# Altium PCB LCD16x2.PcbDoc
Units mil, origin at the board's own origin, x right, y up, seen from the top; angles counter-clockwise.
Board outline 3543.31 x 2755.91 mil, 2 copper layers (Top Layer, Bottom Layer); 14 components, 6 nets, 151 pads, 2 vias.
Unrouted connection lines stored in the file: 2.
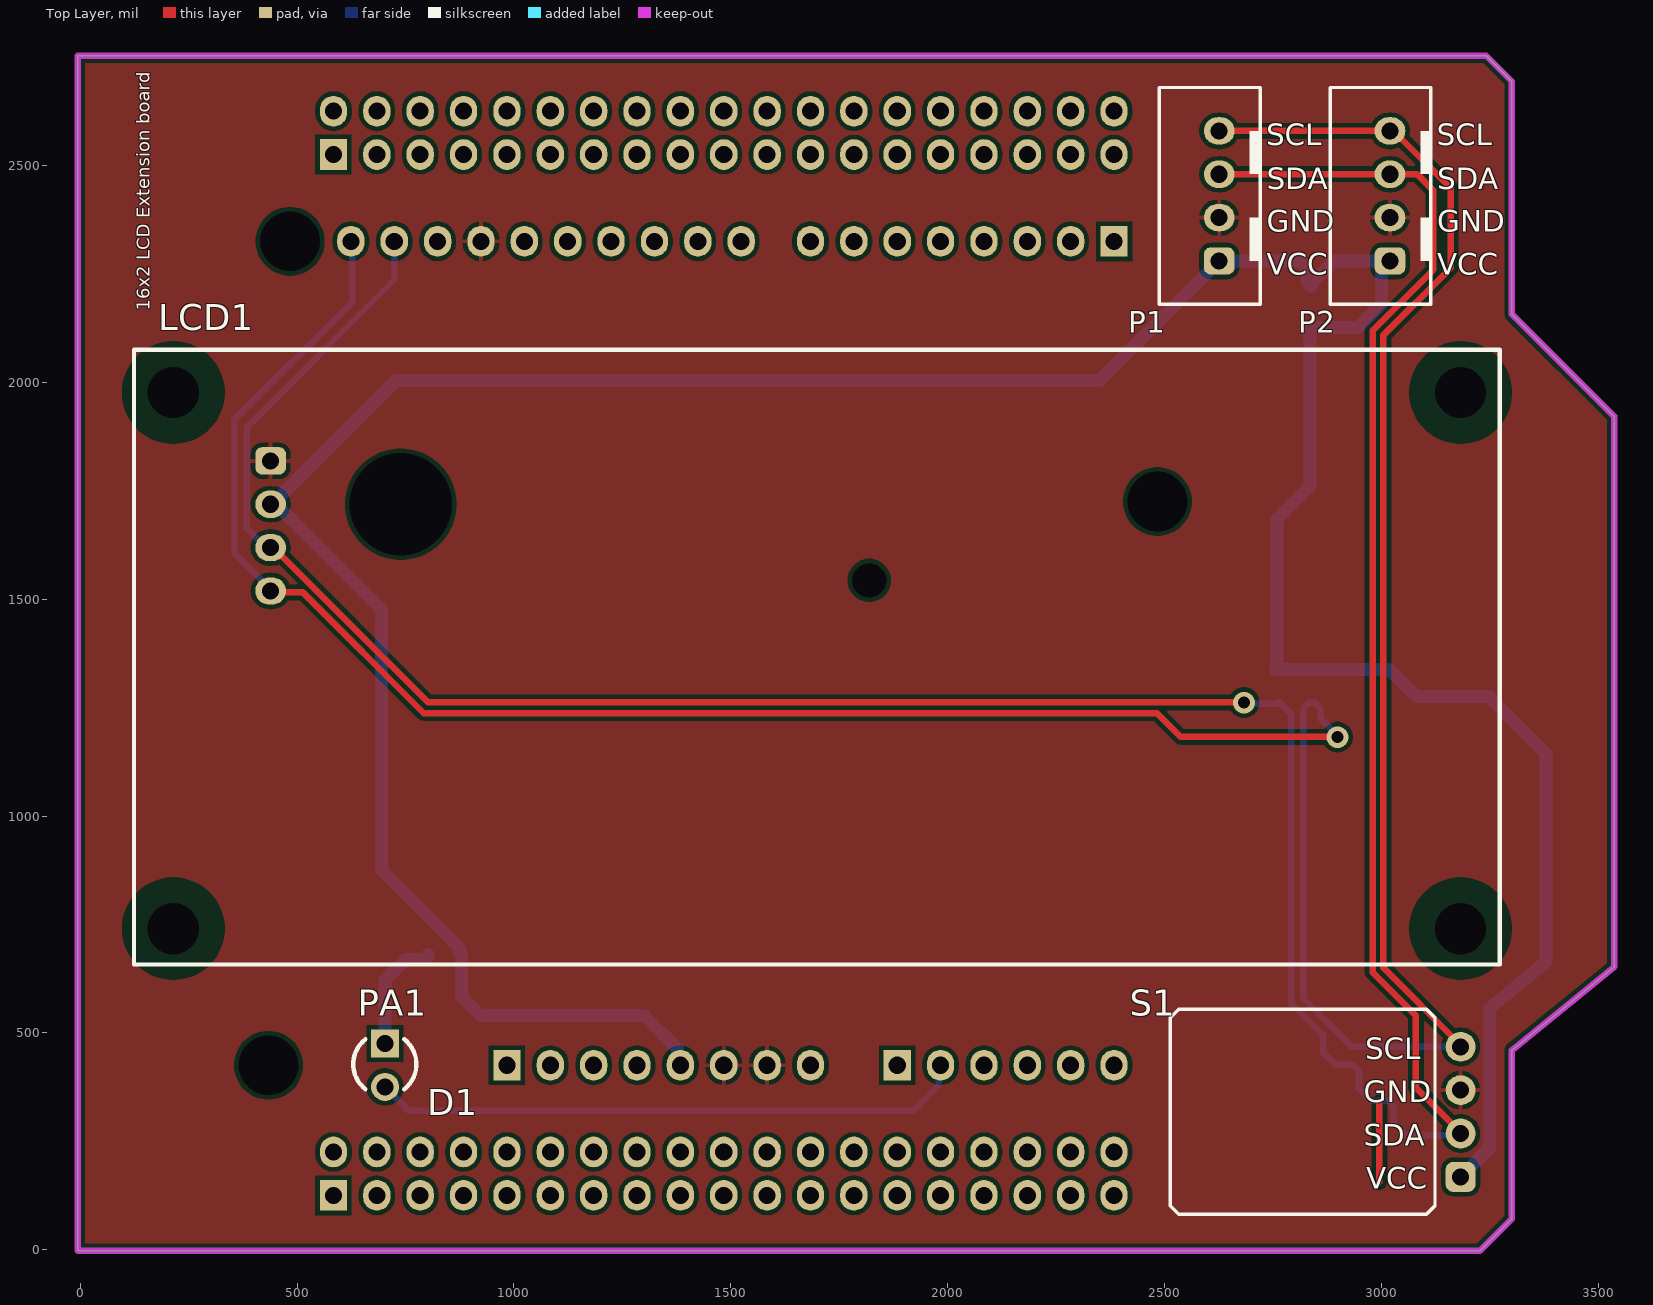
[diagram p0: Top Layer view]
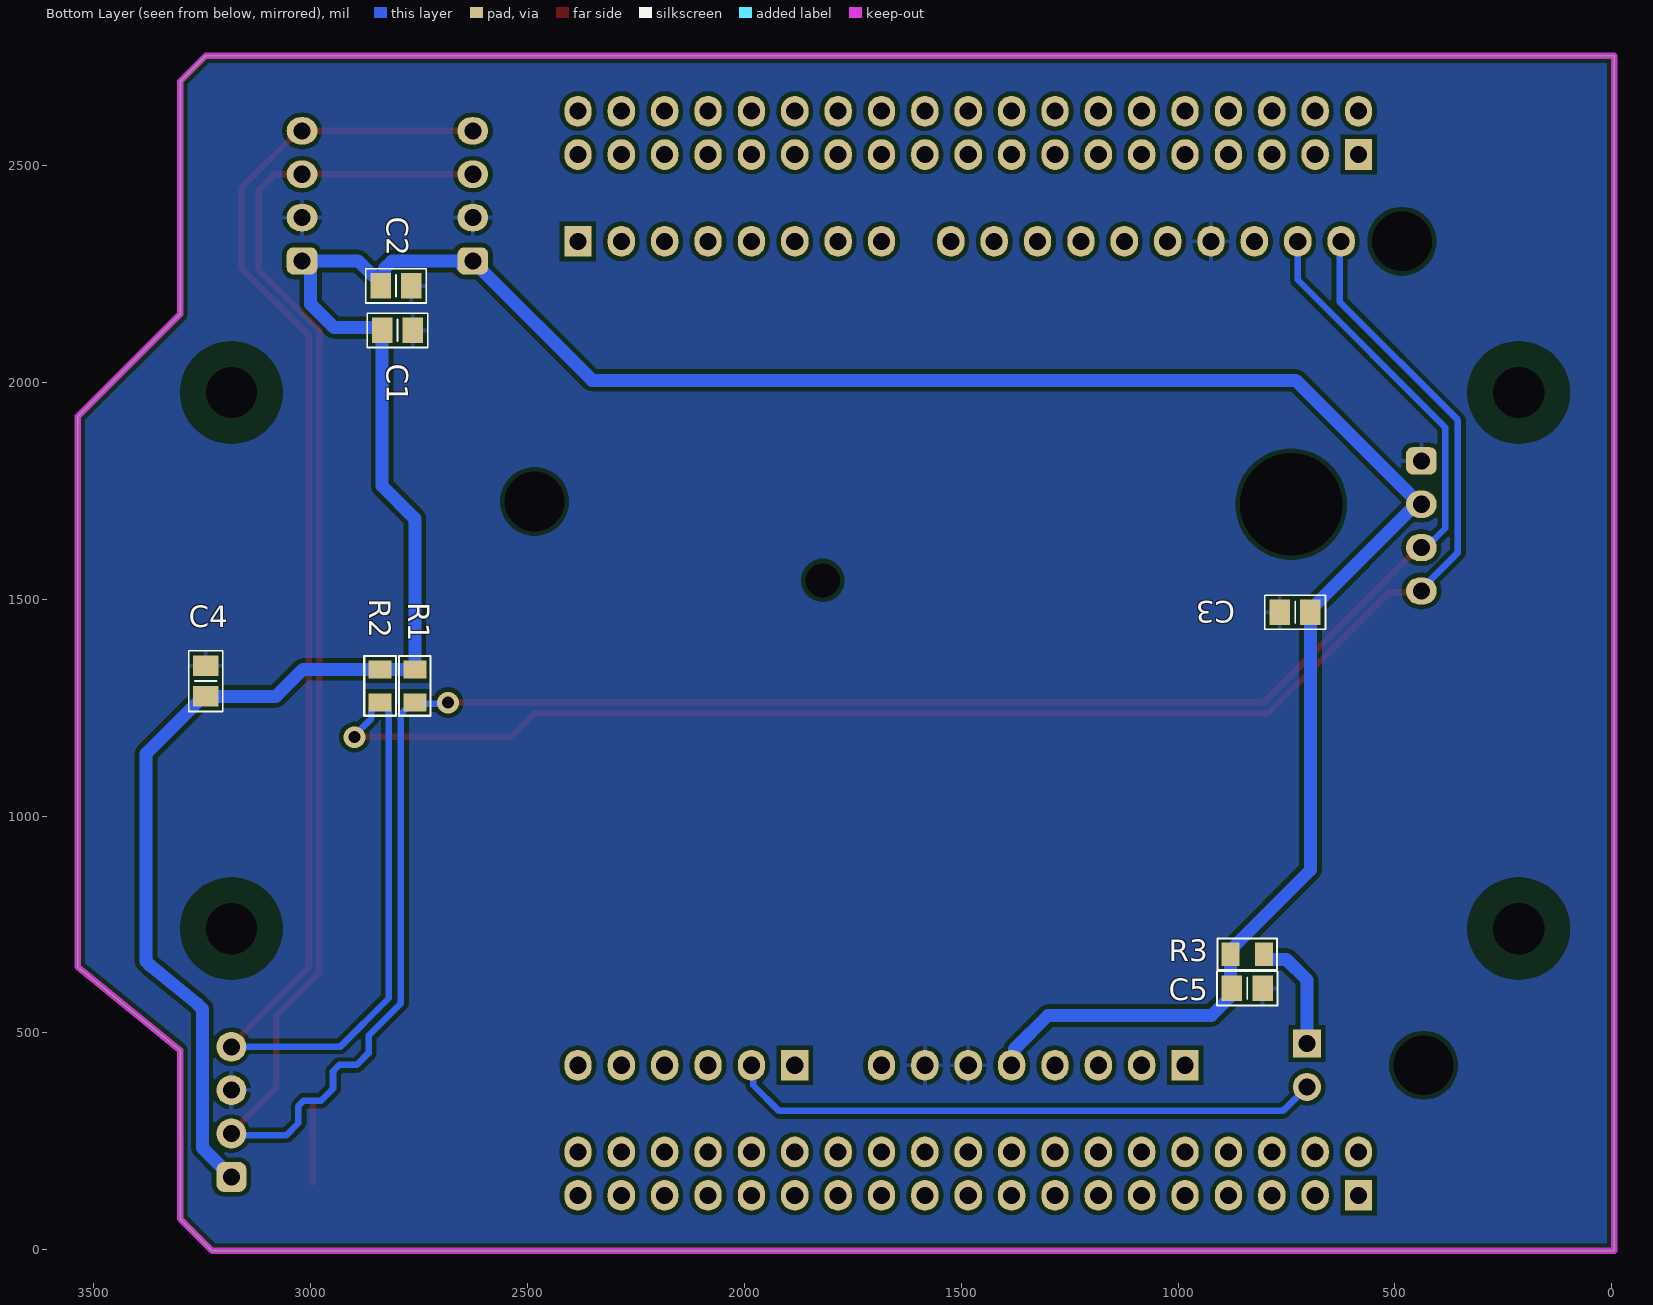
[diagram p1: Bottom Layer view, seen from below]
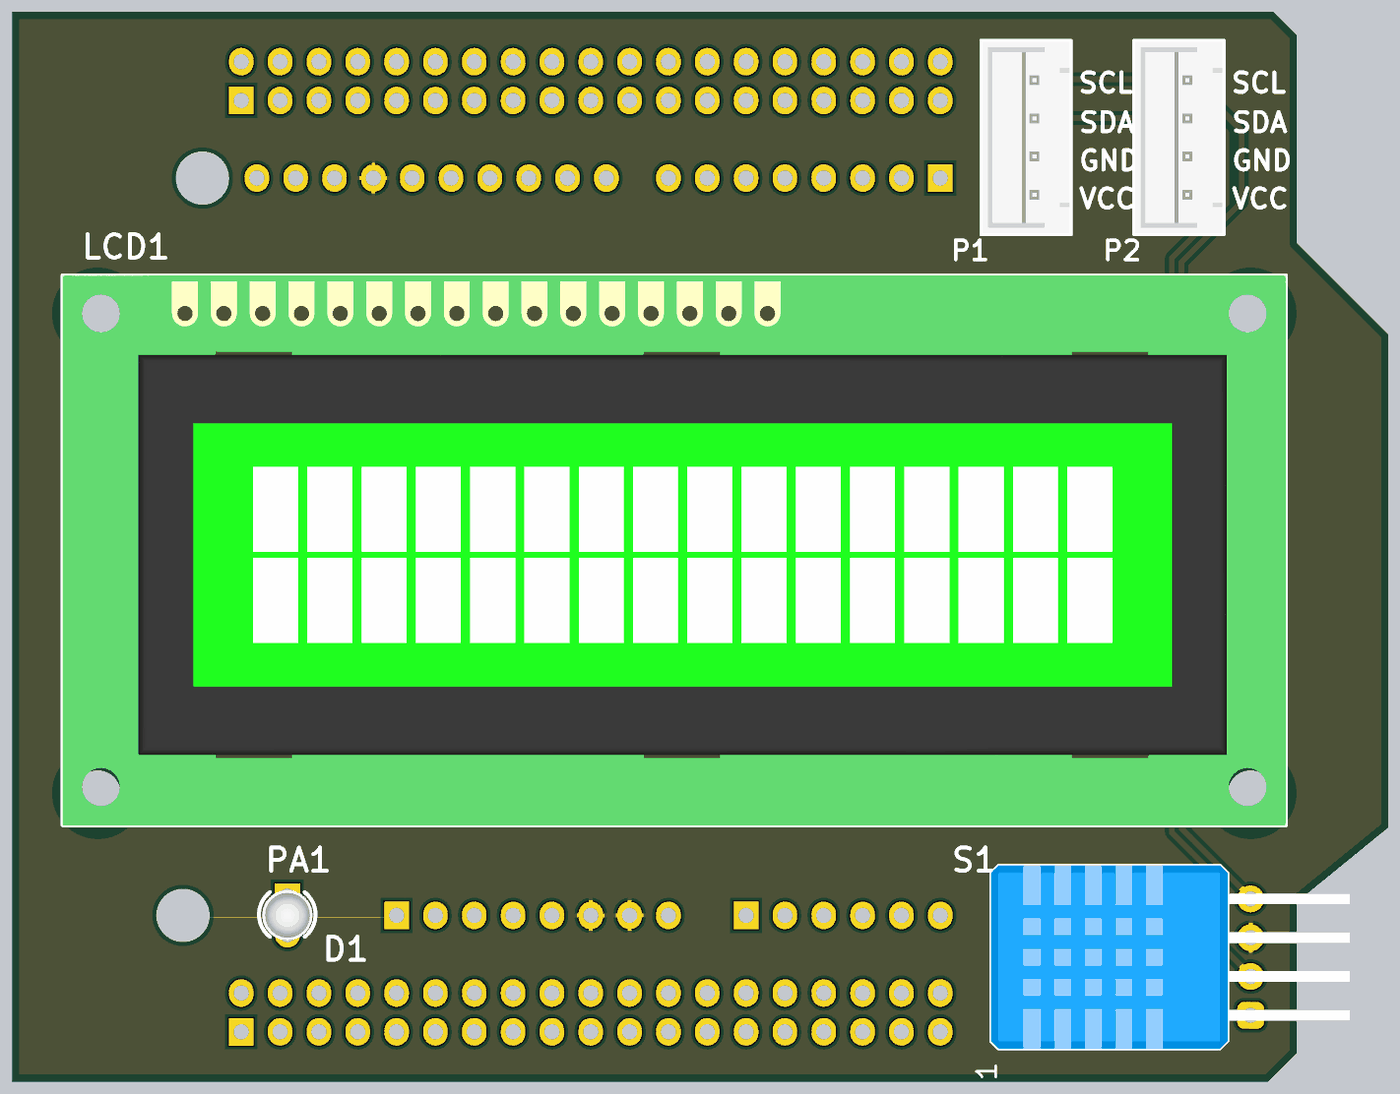
[diagram p2: 3D render of the assembled board from above, using the file's embedded part models]
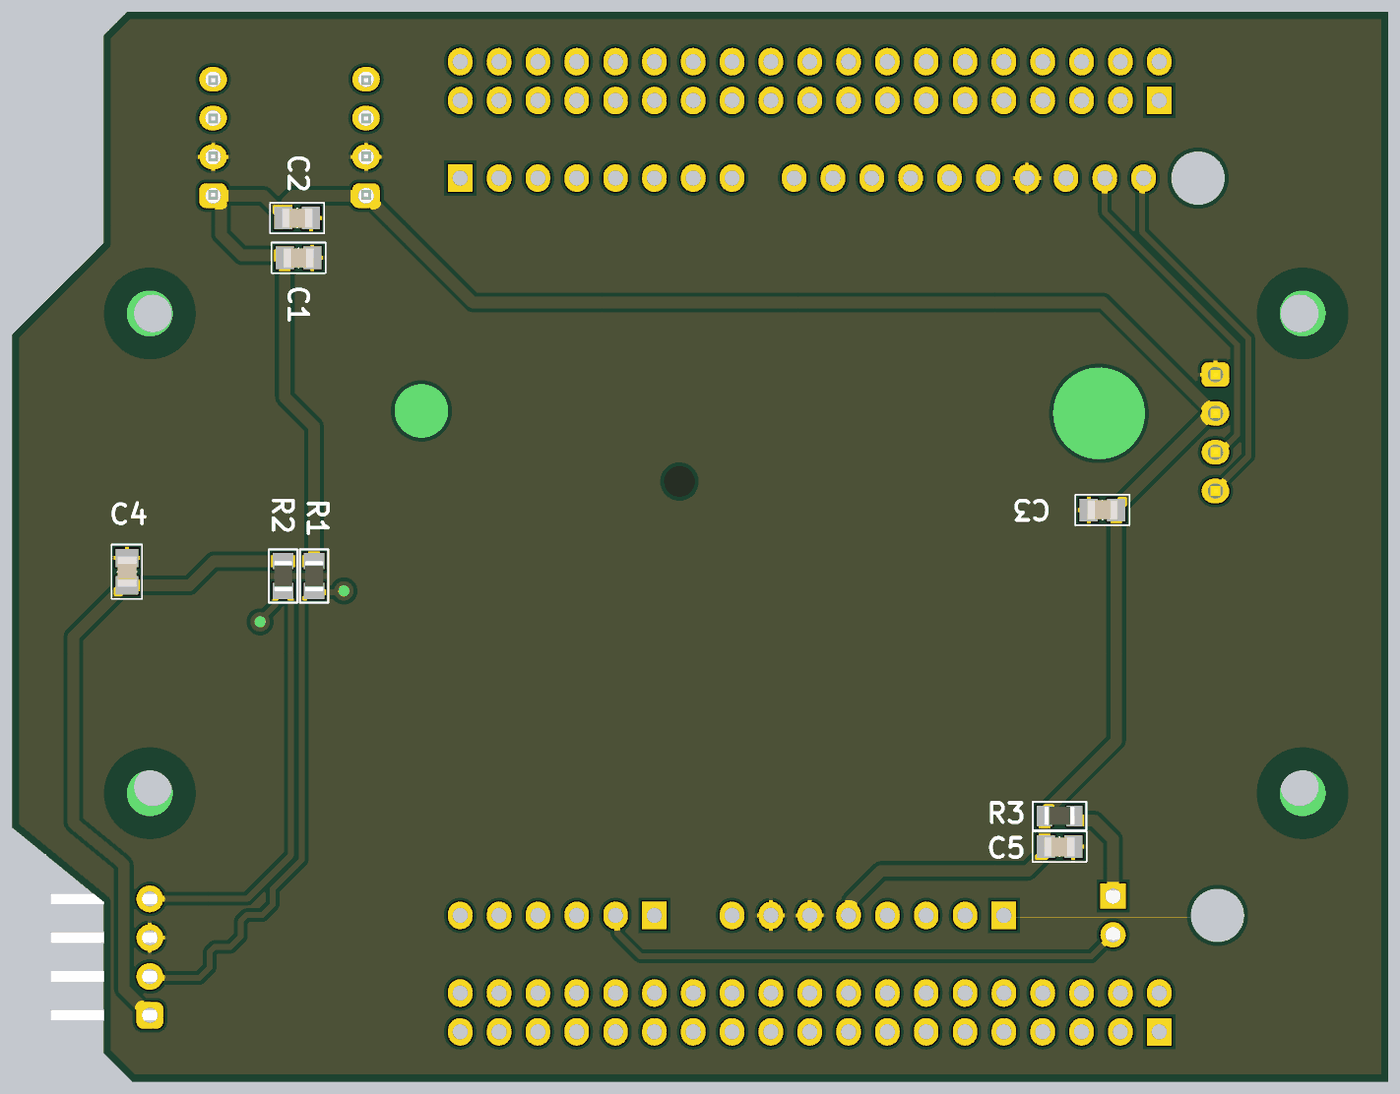
[diagram p3: 3D render of the assembled board from below, using the file's embedded part models]

## Layer stack, top to bottom
Top Solder: solder mask 0.4, Solder Resist, Dk 3.5
Top Layer: signal copper 1.4
Dielectric 1: dielectric 12.6, FR-4, Dk 4.8
Bottom Layer: signal copper 1.4
Bottom Solder: solder mask 0.4, Solder Resist, Dk 3.5

## Board outline
-5.98,-2.6 -5.98,2753.31 3242.24,2753.31 3301.1,2694.45 3301.1,2157.64 3537.32,1921.42 3537.32,652.13 3301.1,459.61 3301.1,71.02 3227.48,-2.6

## Design rules (kind name [scope] priority, off if disabled: settings)
Clearance [All] p1: gap=10 ignorepadtopadclearanceinfootprint=FALSE except(0: Arc-Hole Track-Hole SMDPad-Hole THPad-Hole Via-Hole Fill-Hole Poly-Hole Region-Hole Text-Hole)
ComponentClearance [InComponent('H*') OR InComponent('S1')] p1: gap=0 collisioncheckmode=3 verticalgap=0 showdistances=FALSE
Height [All] p1: minheight=0 maxheight=1181.1 prefheight=500
PolygonConnect [All] p1: connectstyle=Relief reliefconductorwidth=10 reliefentries=4 polygonreliefangle="90 Angle" airgapwidth=10
RoutingVias [All] p1: holewidth=28 width=50 viastyle="Through Hole" minholewidth=28 minwidth=50 maxholewidth=28 maxwidth=50
SolderMaskExpansion [All] p1: expansion=4 istentingtop=FALSE
Width [All] p1: maxlimit=78.74 minlimit=7.87 preferedwidth=15.75 minimp=50.000000 maximp=50.000000 favimp=50.000000
28 further rules are at their usual default settings.

## Components (designator, comment, footprint, x,y, rotation, side; value= is the part's Value field where it differs from the comment)
"16x2 LCD Extension board" "NUCLEO-F103RB" NUCLEO 2503.46,-2.6 r90 top locked (schematic designator U1)
C1 "100nF" "C 0805" 2800,2120 r180 bottom
C2 "100nF" "C 0805" 2803.46,2222.52 r180 bottom
C3 "100nF" "C 0805" 730,1470 r0 bottom
C4 "100nF" "C 0805" 3242.05,1311.18 r90 bottom
C5 "100nF" "C 0805" 840.47,602.52 r180 bottom
D1 "Led" "LED 3MM - red" 702.68,425.35 r270 top
LCD1 "LCD 16x2" "LCD 1602A I2C" 1698.74,1352.52 r0 top locked
P1 "Header 4" HDR/Header/4/BOX 2626.3,2430 r90 top
P2 "Header 4" HDR/Header/4/BOX 3020,2430 r90 top locked
R1 "3.3k" "R 0805" 2760,1300 r90 bottom
R2 "3.3k" "R 0805" 2840,1300 r90 bottom
R3 "150" "R 0805" 840.47,681.26 r0 bottom
S1 "DHT20" DTH20/H 3182.99,317.87 r90 top locked

## Footprints (in the part's own frame and the unit in brackets; to place one, negate y for a bottom-side part, rotate by r counter-clockwise, add the part's x,y. Pads: shape width x height; smd on the part's side, far side on the other; paste and mask are expansions set on the pad)
"C 0805" [mm] "Chip Capacitor, 2-Leads, Body 2.0x1.3mm, IPC Medium Density"
  rect 1.2x1.5 smd: 1(-0.9,0) 2(0.9,0)
  silkscreen extent -1.78,-1 1.78,1, body extent -1,-0.64 1,0.61, height 0.6
DTH20/H [mm] "Temperature and humidity module DTH20"
  rrect50% 1.75x1.75 hole 1: 1(-3.81,0)
  round 1.75 hole 1: 2(-1.27,0) 3(1.27,0) 4(3.81,0)
  silkscreen extent -6,1.5 6,17, body extent -6,-6.5 6,17, height 5.5
HDR/Header/4/BOX [mm]
  rrect50% 1.6x1.8 hole 1: 1(-3.81,0)
  oval 1.6x1.8 hole 1: 2(-1.27,0) 3(1.27,0) 4(3.81,0)
  silkscreen extent -6.35,-2.41 6.35,3.5, body extent -6.25,-2.3 6.25,3.4, height 7
"LCD 1602A I2C" [mm]
  rrect50% 1.8x1.6 hole 1: 1(-32,11.85)
  oval 1.8x1.6 hole 1: 2(-32,9.31) 3(-32,6.77) 4(-32,4.23)
  round 0 hole 6 unplated: HOLE(-24.38,9.31)
  round 0 hole 2 unplated: HOLE(3.06,4.85)
  round 0 hole 3 unplated: HOLG(37.7,-15.55) HOLH(-37.7,-15.55) HOLH(-37.7,15.85) HOLH(37.7,15.85)
  Top Layer pour cut-out: 34.7,15.85 34.928,14.702 35.579,13.729 36.552,13.078 37.7,12.85 37.7,12.85 38.848,13.078 39.821,13.729 40.472,14.702 40.7,15.85 40.7,15.85 40.472,16.998 39.821,17.971 38.848,18.622 37.7,18.85 37.7,18.85 36.552,18.622 35.579,17.971 34.928,16.998 34.7,15.85
  Top Layer pour cut-out: -40.7,15.85 -40.472,14.702 -39.821,13.729 -38.848,13.078 -37.7,12.85 -37.7,12.85 -36.552,13.078 -35.579,13.729 -34.928,14.702 -34.7,15.85 -34.7,15.85 -34.928,16.998 -35.579,17.971 -36.552,18.622 -37.7,18.85 -37.7,18.85 -38.848,18.622 -39.821,17.971 -40.472,16.998 -40.7,15.85
  Top Layer pour cut-out: -40.7,-15.55 -40.472,-16.698 -39.821,-17.671 -38.848,-18.322 -37.7,-18.55 -37.7,-18.55 -36.552,-18.322 -35.579,-17.671 -34.928,-16.698 -34.7,-15.55 -34.7,-15.55 -34.928,-14.402 -35.579,-13.429 -36.552,-12.778 -37.7,-12.55 -37.7,-12.55 -38.848,-12.778 -39.821,-13.429 -40.472,-14.402 -40.7,-15.55
  Top Layer pour cut-out: 34.7,-15.55 34.928,-16.698 35.579,-17.671 36.552,-18.322 37.7,-18.55 37.7,-18.55 38.848,-18.322 39.821,-17.671 40.472,-16.698 40.7,-15.55 40.7,-15.55 40.472,-14.402 39.821,-13.429 38.848,-12.778 37.7,-12.55 37.7,-12.55 36.552,-12.778 35.579,-13.429 34.928,-14.402 34.7,-15.55
  Bottom Layer pour cut-out: 34.7,15.85 34.928,14.702 35.579,13.729 36.552,13.078 37.7,12.85 37.7,12.85 38.848,13.078 39.821,13.729 40.472,14.702 40.7,15.85 40.7,15.85 40.472,16.998 39.821,17.971 38.848,18.622 37.7,18.85 37.7,18.85 36.552,18.622 35.579,17.971 34.928,16.998 34.7,15.85
  Bottom Layer pour cut-out: -40.7,15.85 -40.472,14.702 -39.821,13.729 -38.848,13.078 -37.7,12.85 -37.7,12.85 -36.552,13.078 -35.579,13.729 -34.928,14.702 -34.7,15.85 -34.7,15.85 -34.928,16.998 -35.579,17.971 -36.552,18.622 -37.7,18.85 -37.7,18.85 -38.848,18.622 -39.821,17.971 -40.472,16.998 -40.7,15.85
  Bottom Layer pour cut-out: -40.7,-15.55 -40.472,-16.698 -39.821,-17.671 -38.848,-18.322 -37.7,-18.55 -37.7,-18.55 -36.552,-18.322 -35.579,-17.671 -34.928,-16.698 -34.7,-15.55 -34.7,-15.55 -34.928,-14.402 -35.579,-13.429 -36.552,-12.778 -37.7,-12.55 -37.7,-12.55 -38.848,-12.778 -39.821,-13.429 -40.472,-14.402 -40.7,-15.55
  Bottom Layer pour cut-out: 34.7,-15.55 34.928,-16.698 35.579,-17.671 36.552,-18.322 37.7,-18.55 37.7,-18.55 38.848,-18.322 39.821,-17.671 40.472,-16.698 40.7,-15.55 40.7,-15.55 40.472,-14.402 39.821,-13.429 38.848,-12.778 37.7,-12.55 37.7,-12.55 36.552,-12.778 35.579,-13.429 34.928,-14.402 34.7,-15.55
  silkscreen extent -40,-17.65 40,18.35, body extent -40.61,-18.1 40.62,18.4, height 22
"LED 3MM - red" [mil]
  rect 65x65 hole 39: 1(-50,0)
  round 65 hole 39: 2(50,0)
  silkscreen extent -60,-73 55,72, body extent -66,-65 64,65, height 207
NUCLEO [mm]
  oval 1.8x1.6 hole 1: A5_1(59.13,24.88) A5_2(59.13,27.42) A5_3(59.13,29.96) A5_4(59.13,32.5) A5_5(59.13,35.04) A5_6(59.13,37.58) A5_7(59.13,40.12) A5_8(59.13,42.66) A5_9(59.13,45.2) A5_10(59.13,47.74) A6_2(10.87,36.06) A6_3(10.87,33.52) A6_4(10.87,30.98) A6_5(10.87,28.44) A6_6(10.87,25.9) A6_7(10.87,23.36) A6_8(10.87,20.82) A8_2(10.87,13.2) A8_3(10.87,10.66) A8_4(10.87,8.12) A8_5(10.87,5.58) A8_6(10.87,3.04) A9_2(59.13,5.58) A9_3(59.13,8.12) A9_4(59.13,10.66) A9_5(59.13,13.2) A9_6(59.13,15.74) A9_7(59.13,18.28) A9_8(59.13,20.82) M7_2(5.79,48.76) M7_3(3.25,46.22) M7_4(5.79,46.22) M7_5(3.25,43.68) M7_6(5.79,43.68) M7_7(3.25,41.14) M7_8(5.79,41.14) M7_9(3.25,38.6) M7_10(5.79,38.6) M7_11(3.25,36.06) M7_12(5.79,36.06) M7_13(3.25,33.52) M7_14(5.79,33.52) M7_15(3.25,30.98) M7_16(5.79,30.98) M7_17(3.25,28.44) M7_18(5.79,28.44) M7_19(3.25,25.9) M7_20(5.79,25.9) M7_21(3.25,23.36) M7_22(5.79,23.36) M7_23(3.25,20.82) M7_24(5.79,20.82) M7_25(3.25,18.28) M7_26(5.79,18.28) M7_27(3.25,15.74) M7_28(5.79,15.74) M7_29(3.25,13.2) M7_30(5.79,13.2) M7_31(3.25,10.66) M7_32(5.79,10.66) M7_33(3.25,8.12) M7_34(5.79,8.12) M7_35(3.25,5.58) M7_36(5.79,5.58) M7_37(3.25,3.04) M7_38(5.79,3.04) M10_2(66.75,48.76) M10_3(64.21,46.22) M10_4(66.75,46.22) M10_5(64.21,43.68) M10_6(66.75,43.68) M10_7(64.21,41.14) M10_8(66.75,41.14) M10_9(64.21,38.6) M10_10(66.75,38.6) M10_11(64.21,36.06) M10_12(66.75,36.06) M10_13(64.21,33.52) M10_14(66.75,33.52) M10_15(64.21,30.98) M10_16(66.75,30.98) M10_17(64.21,28.44) M10_18(66.75,28.44) M10_19(64.21,25.9) M10_20(66.75,25.9) M10_21(64.21,23.36) M10_22(66.75,23.36) M10_23(64.21,20.82) M10_24(66.75,20.82) M10_25(64.21,18.28) M10_26(66.75,18.28) M10_27(64.21,15.74) M10_28(66.75,15.74) M10_29(64.21,13.2) M10_30(66.75,13.2) M10_31(64.21,10.66) M10_32(66.75,10.66) M10_33(64.21,8.12) M10_34(66.75,8.12) M10_35(64.21,5.58) M10_36(66.75,5.58) M10_37(64.21,3.04) M10_38(66.75,3.04)
  rect 1.8x1.6 hole 1: A6_1(10.87,38.6) A8_1(10.87,15.74) A9_1(59.13,3.04) M7_1(3.25,48.76) M10_1(64.21,48.76)
  round 0 hole 3.5 unplated: HOLD(10.87,52.57) HOLD(43.89,0.5) HOLD(59.13,51.3)
  Keep-Out Layer lines w0.381: 11.74,-20.26 1.87,-20.26 0,-18.39 0,63.74 70,63.74 70,-18.765 68.505,-20.26 54.87,-20.26 48.87,-26.26 16.63,-26.26
"R 0805" [mm] "Chip Resistor, 2-Leads, Body 2.0x1.3mm, IPC Medium Density"
  rect 1.05x1.35 smd: 1(-0.975,0) 2(0.975,0)
  silkscreen extent -1.75,-0.92 1.75,0.92, body extent -1,-0.61 1,0.59, height 0.5

## Part data
"16x2 LCD Extension board": "STM32F103RB, mbed-Enabled Development Nucleo-64 STM32F1 ARM® Cortex®-M3 MCU 32-Bit Embedded Evaluation Board", Manufacturer=STMicroelectronics, BRAND=STMicroelectronics, Manufacturer Product Number=NUCLEO-F103RB, PART NO=NUCLEO-F103RB, STOCK CODE=497-14362-ND, SUPPLIER=digi-key, TYPE="EVAL BRD"
C1 C2 C3 C4 C5: library part "Capacitor NP", "Capacitor non-pol"
D1: "Typical LED"
LCD1: "Character LCD 16x2"
P1 P2: "Header, 4-Pin"
R1 R2 R3: library part Resistor, "Resistor"
S1: library part DTH20, "DTH20 Temperature and humidity module"

## Via types
v1: diameter 50, hole 28, Top Layer to Bottom Layer, tented top, 2 vias

## Nets (pads, with @x,y where several pads share a name; then routed paths per layer and width w, separated by ;. In a path a pad name is that pad's centre, name@x,y a point inside that pad or via, vN(x,y) a via of type N, cw(c..) or ccw(c..) an arc to the next point about the centre after c; other vN are vias at no path point)
+5: "16x2 LCD Extension board.A6_5" C1.1 C2.1 C3.1 C4.1 C5.1 LCD1.2 P1.1 P2.1 R1.2 R2.2 R3.2 S1.1 | length 7694.1
  Bottom Layer w30: LCD1.2 LCD1.2@442.83,1719.06 ; 1383.78,425.35 1377.47,431.67 1377.47,462.53 1300,540 922.68,540 878.86,583.82 R3.2 873.19,686.93 873.19,696.81 694.57,875.43 C3.1 694.57,1475.91 451.42,1719.06 LCD1.2@442.83,1719.06 ; P1.1@2645.87,2264.37 P1.1@2661.5,2280 ; C2.1 2830.28,2231.14 2830.28,2262.43 2812.7,2280 P1.1@2661.5,2280 ; C2.1@2838.9,2228.43 2890.47,2280 P2.1 3016.47,2280 3000.03,2263.56 3000.03,2180.03 2946.11,2126.11 2841.54,2126.11 C1.1 2835.43,1761 2760,1685.57 2760,1342.8 2755.59,1338.39 R2.2 3017.99,1338.39 3080.63,1275.75 3247.95,1275.75 3379.84,1143.86 3379.84,664.88 3371.06,656.09 3369.98,655.01 3261.05,566.23 3250,555.19 3250,542.98 3250,234.88 S1.1 ; LCD1.2@442.83,1719.06 728.7,2004.92 2351.22,2004.92 2606.33,2260.03 2606.33,2263.56 2622.77,2280 P1.1@2661.5,2280
GND: "16x2 LCD Extension board.A5_7" "16x2 LCD Extension board.A6_6" "16x2 LCD Extension board.A6_7" C1.2 C2.2 C3.2 C4.2 C5.2 LCD1.1 P1.2 P2.2 S1.3
LED: "16x2 LCD Extension board.A8_2" D1.2 | length 1372
  Bottom Layer w15: D1.2 758.03,320 1920,320 1979.42,379.42 1979.42,420.99 1983.78,425.35
NetD1_1: D1.1 R3.1 | length 274.2
  Bottom Layer w30: D1.1 702.68,622.2 750.16,669.68 796.42,669.68 802.09,675.35 R3.1
SCL: "16x2 LCD Extension board.A5_10" LCD1.4 P1.4 P2.4 R2.1 S1.4 | length 7463.5
  Top Layer w15: LCD1.4 442.45,1515.51 513.35,1515.51 791.83,1237.02 2482.98,1237.02 2537.53,1182.47 v1@2898.48,1182.47 ; P1.4 P2.4 ; P2.4@3020.58,2580.58 3027.52,2580.58 3160,2448.09 3160,2264.02 3005,2109.02 3005,650.02 3182.42,472.61 S1.4@3182.42,468.45
  Bottom Layer w15: LCD1.4@438.32,1519.63 438.32,1523.79 354.49,1607.62 354.49,1913.05 627.52,2186.07 627.52,2321.78 623.94,2325.35 ; R2.1 2834.09,1261.61 2820.93,1248.44 2820.93,1240.58 2820,1239.66 2820,580 2931.55,468.45 S1.4@3182.42,468.45 ; R2.1@2844.62,1261.61 2845.91,1261.61 2859.07,1248.44 2859.07,1240.58 2860,1239.66 2860,1225.1 2898.48,1186.62 v1@2898.48,1182.47
  other v1: 2899.06,1181.89
SDA: "16x2 LCD Extension board.A5_9" LCD1.3 P1.3 P2.3 R1.1 S1.2 | length 7466.1
  Top Layer w15: LCD1.3@439.3,1619.46 444.75,1619.46 802.19,1262.02 v1@2682.9,1262.02 ; P1.3@2626.74,2480.44 P2.3@3019.56,2480.44 ; P2.3@3020.4,2480.4 3082.28,2480.4 3120,2442.69 3120,2259.37 2980,2119.37 2980,639.67 3080,539.67 3080,373.55 3182.99,270.56 S1.2
  Bottom Layer w15: LCD1.3 428.05,1619.06 383.54,1663.56 383.54,1896.12 723.94,2236.51 723.94,2325.35 ; v1(2683.31,1261.61) 2686.31,1258.62 2757,1258.62 R1.1 ; R1.1@2765.5,1262.02 2791.91,1235.61 2791.91,568.09 2866.6,493.39 2866.6,453.39 2893.95,426.05 2933.95,426.05 2948.65,411.35 2948.65,371.35 2976,344 3016,344 3028.65,331.35 3028.65,291.35 3056,264 3179.11,264 S1.2
pads on no net: "16x2 LCD Extension board.A5_1" "16x2 LCD Extension board.A5_2" "16x2 LCD Extension board.A5_3" "16x2 LCD Extension board.A5_4" "16x2 LCD Extension board.A5_5" "16x2 LCD Extension board.A5_6" "16x2 LCD Extension board.A5_8" "16x2 LCD Extension board.A6_1" "16x2 LCD Extension board.A6_2" "16x2 LCD Extension board.A6_3" "16x2 LCD Extension board.A6_4" "16x2 LCD Extension board.A6_8" "16x2 LCD Extension board.A8_1" "16x2 LCD Extension board.A8_3" "16x2 LCD Extension board.A8_4" "16x2 LCD Extension board.A8_5" "16x2 LCD Extension board.A8_6" "16x2 LCD Extension board.A9_1" "16x2 LCD Extension board.A9_2" "16x2 LCD Extension board.A9_3" "16x2 LCD Extension board.A9_4" "16x2 LCD Extension board.A9_5" "16x2 LCD Extension board.A9_6" "16x2 LCD Extension board.A9_7" "16x2 LCD Extension board.A9_8" "16x2 LCD Extension board.HOLD" "16x2 LCD Extension board.M7_1" "16x2 LCD Extension board.M7_2" "16x2 LCD Extension board.M7_3" "16x2 LCD Extension board.M7_4" "16x2 LCD Extension board.M7_5" "16x2 LCD Extension board.M7_6" "16x2 LCD Extension board.M7_7" "16x2 LCD Extension board.M7_8" "16x2 LCD Extension board.M7_9" "16x2 LCD Extension board.M7_10" "16x2 LCD Extension board.M7_11" "16x2 LCD Extension board.M7_12" "16x2 LCD Extension board.M7_13" "16x2 LCD Extension board.M7_14" "16x2 LCD Extension board.M7_15" "16x2 LCD Extension board.M7_16" "16x2 LCD Extension board.M7_17" "16x2 LCD Extension board.M7_18" "16x2 LCD Extension board.M7_19" "16x2 LCD Extension board.M7_20" "16x2 LCD Extension board.M7_21" "16x2 LCD Extension board.M7_22" "16x2 LCD Extension board.M7_23" "16x2 LCD Extension board.M7_24" "16x2 LCD Extension board.M7_25" "16x2 LCD Extension board.M7_26" "16x2 LCD Extension board.M7_27" "16x2 LCD Extension board.M7_28" "16x2 LCD Extension board.M7_29" "16x2 LCD Extension board.M7_30" "16x2 LCD Extension board.M7_31" "16x2 LCD Extension board.M7_32" "16x2 LCD Extension board.M7_33" "16x2 LCD Extension board.M7_34" "16x2 LCD Extension board.M7_35" "16x2 LCD Extension board.M7_36" "16x2 LCD Extension board.M7_37" "16x2 LCD Extension board.M7_38" "16x2 LCD Extension board.M10_1" "16x2 LCD Extension board.M10_2" "16x2 LCD Extension board.M10_3" "16x2 LCD Extension board.M10_4" "16x2 LCD Extension board.M10_5" "16x2 LCD Extension board.M10_6" "16x2 LCD Extension board.M10_7" "16x2 LCD Extension board.M10_8" "16x2 LCD Extension board.M10_9" "16x2 LCD Extension board.M10_10" "16x2 LCD Extension board.M10_11" "16x2 LCD Extension board.M10_12" "16x2 LCD Extension board.M10_13" "16x2 LCD Extension board.M10_14" "16x2 LCD Extension board.M10_15" "16x2 LCD Extension board.M10_16" "16x2 LCD Extension board.M10_17" "16x2 LCD Extension board.M10_18" "16x2 LCD Extension board.M10_19" "16x2 LCD Extension board.M10_20" "16x2 LCD Extension board.M10_21" "16x2 LCD Extension board.M10_22" "16x2 LCD Extension board.M10_23" "16x2 LCD Extension board.M10_24" "16x2 LCD Extension board.M10_25" "16x2 LCD Extension board.M10_26" "16x2 LCD Extension board.M10_27" "16x2 LCD Extension board.M10_28" "16x2 LCD Extension board.M10_29" "16x2 LCD Extension board.M10_30" "16x2 LCD Extension board.M10_31" "16x2 LCD Extension board.M10_32" "16x2 LCD Extension board.M10_33" "16x2 LCD Extension board.M10_34" "16x2 LCD Extension board.M10_35" "16x2 LCD Extension board.M10_36" "16x2 LCD Extension board.M10_37" "16x2 LCD Extension board.M10_38" LCD1.HOLE LCD1.HOLG LCD1.HOLH
copper on no net: | length 184.1
  Top Layer w15: 2995.51,155.46 2995.51,339.54

## Polygon pours and split planes (outlines as drawn)
GND on Top Layer "NONET_L-01_P-001" (solid, remove dead copper, pour order 2): 3220,0 3300,80 3300,460 3340,460 3540,660 3540,1920 3300,2160 3300,2700 3240,2760 3220,2740 0,2740 0,0 0,2740 0,0
GND on Bottom Layer "NONET_L-01_P-001" (solid, remove dead copper, pour order 1): 0,0 3220,0 3300,80 3300,440 3320,440 3540,660 3540,1920 3300,2160 3300,2700 3240,2760 3220,2740 0,2740

## Keep-outs
Keep-Out Layer:
  lines w15: 3301.1,459.61 3537.32,652.13

## Silkscreen, mask and mechanical layers (free items; w line width, h text height)
Top Overlay:
  text "SCL" at 2734.41,2547.17 h50
  text "SCL" at 3128.11,2547.17 h50
  text "SDA" at 2735.78,2445.43 h50
  text "SDA" at 3129.48,2445.43 h50
  text "GND" at 2735.78,2347.01 h50
  text "GND" at 3129.48,2347.01 h50
  text "VCC" at 2735.78,2248.58 h50
  text "VCC" at 3129.48,2248.58 h50
  text "PA1" at 640,540 h60
  text "SCL" at 2963.62,438.61 h50
  text "GND" at 2960,340 h50
  text "SDA" at 2960,240 h50
  text "VCC" at 2965,140.03 h50